# Altium PCB 转叶板-轴心.PcbDoc
Units mm, origin at the board's own origin, x right, y up, seen from the top; angles counter-clockwise.
Board outline 45 x 45 mm, 2 copper layers (Top Layer, Bottom Layer); 10 components, 3 nets, 26 pads, 0 vias.
Unrouted connection lines stored in the file: 21.
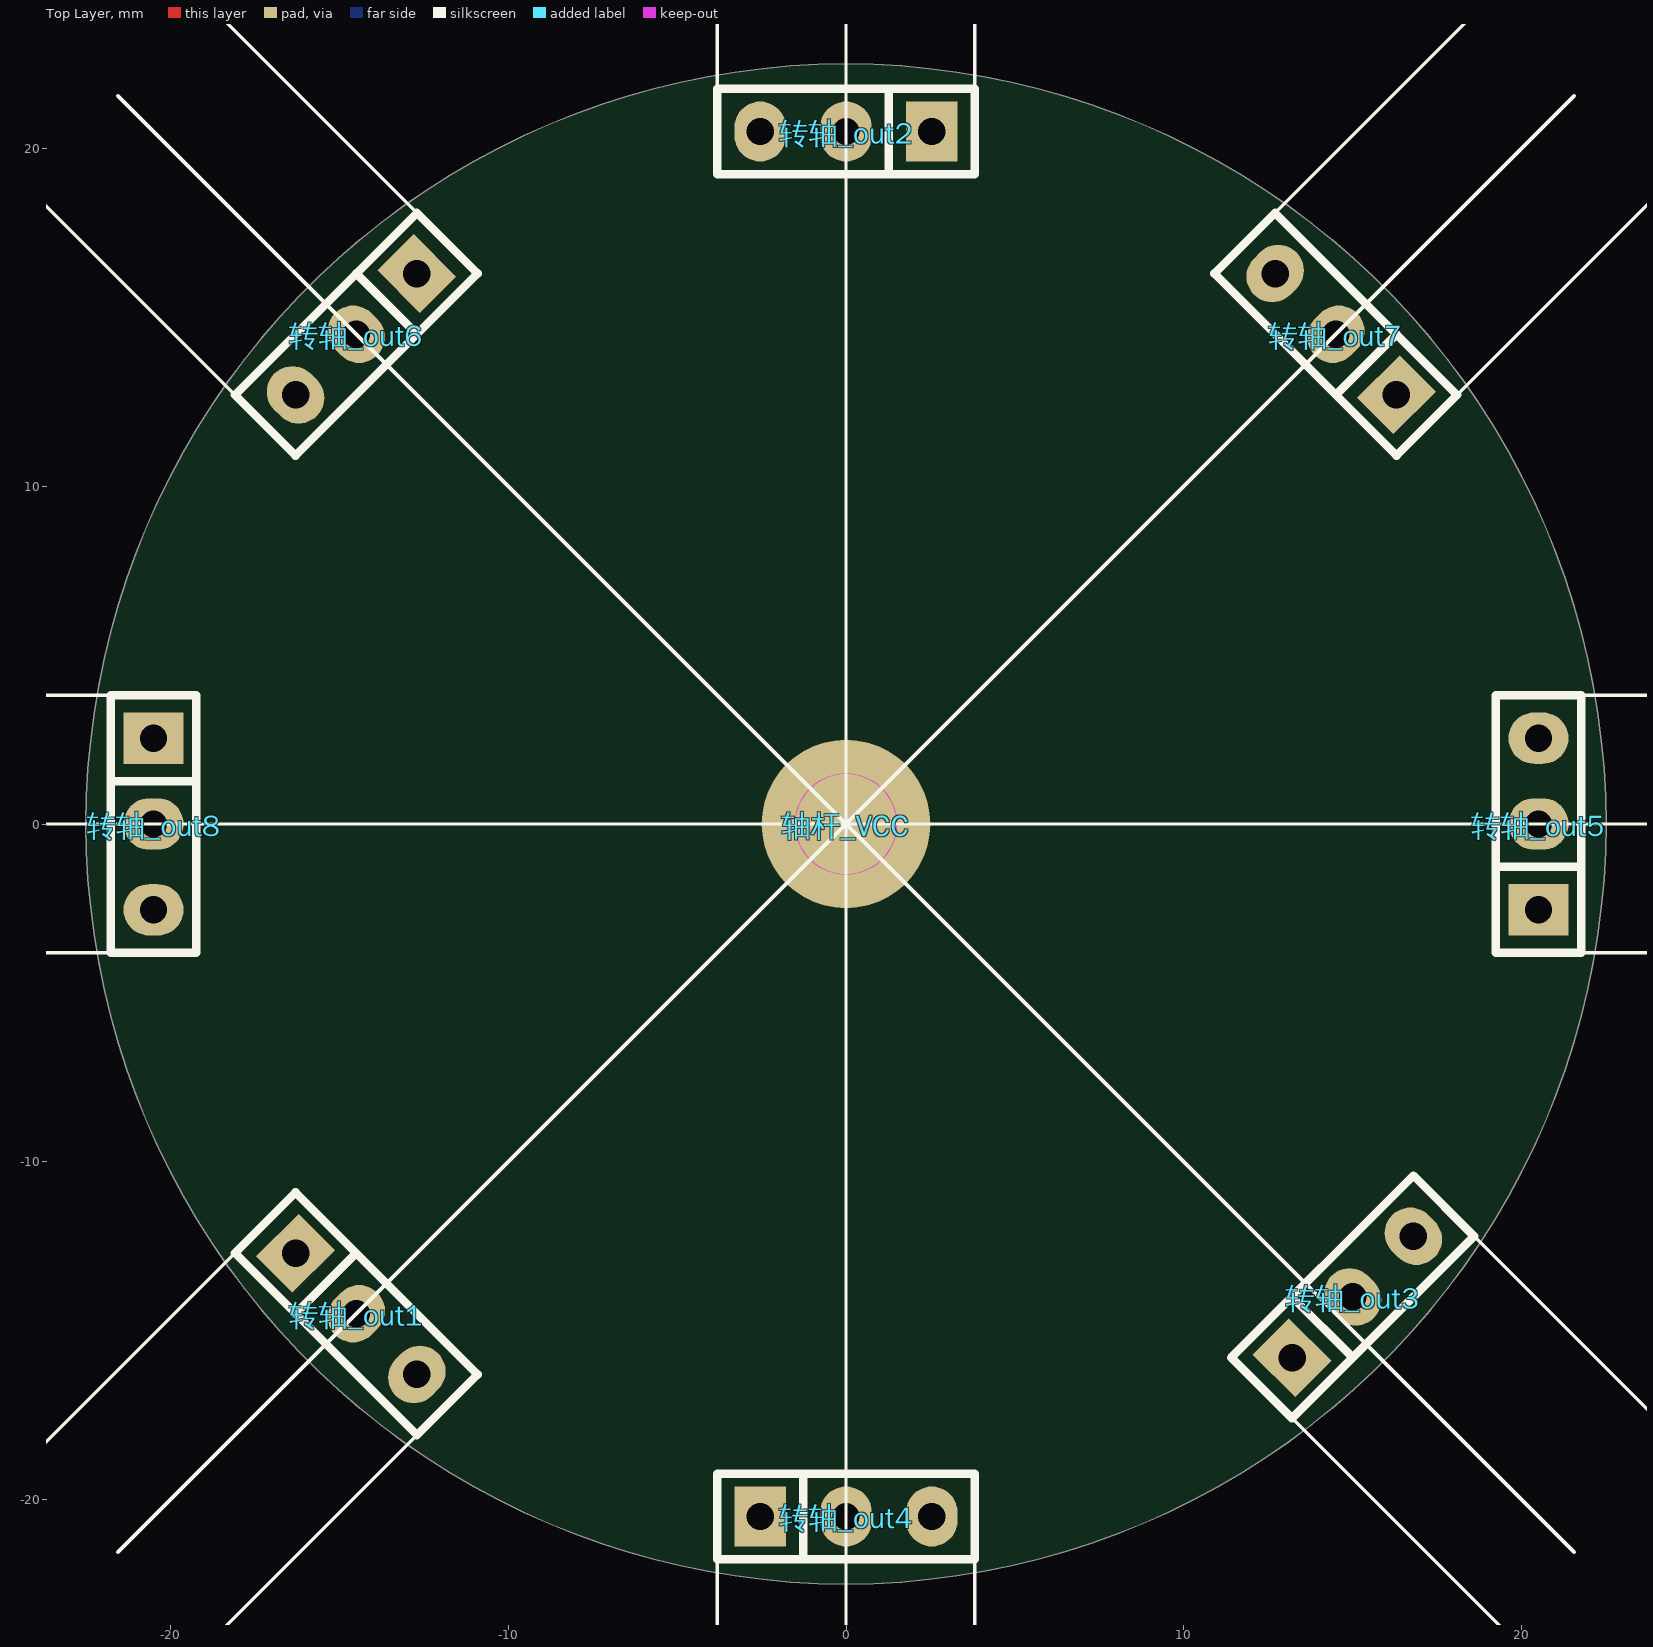
[diagram p0: Top Layer view]
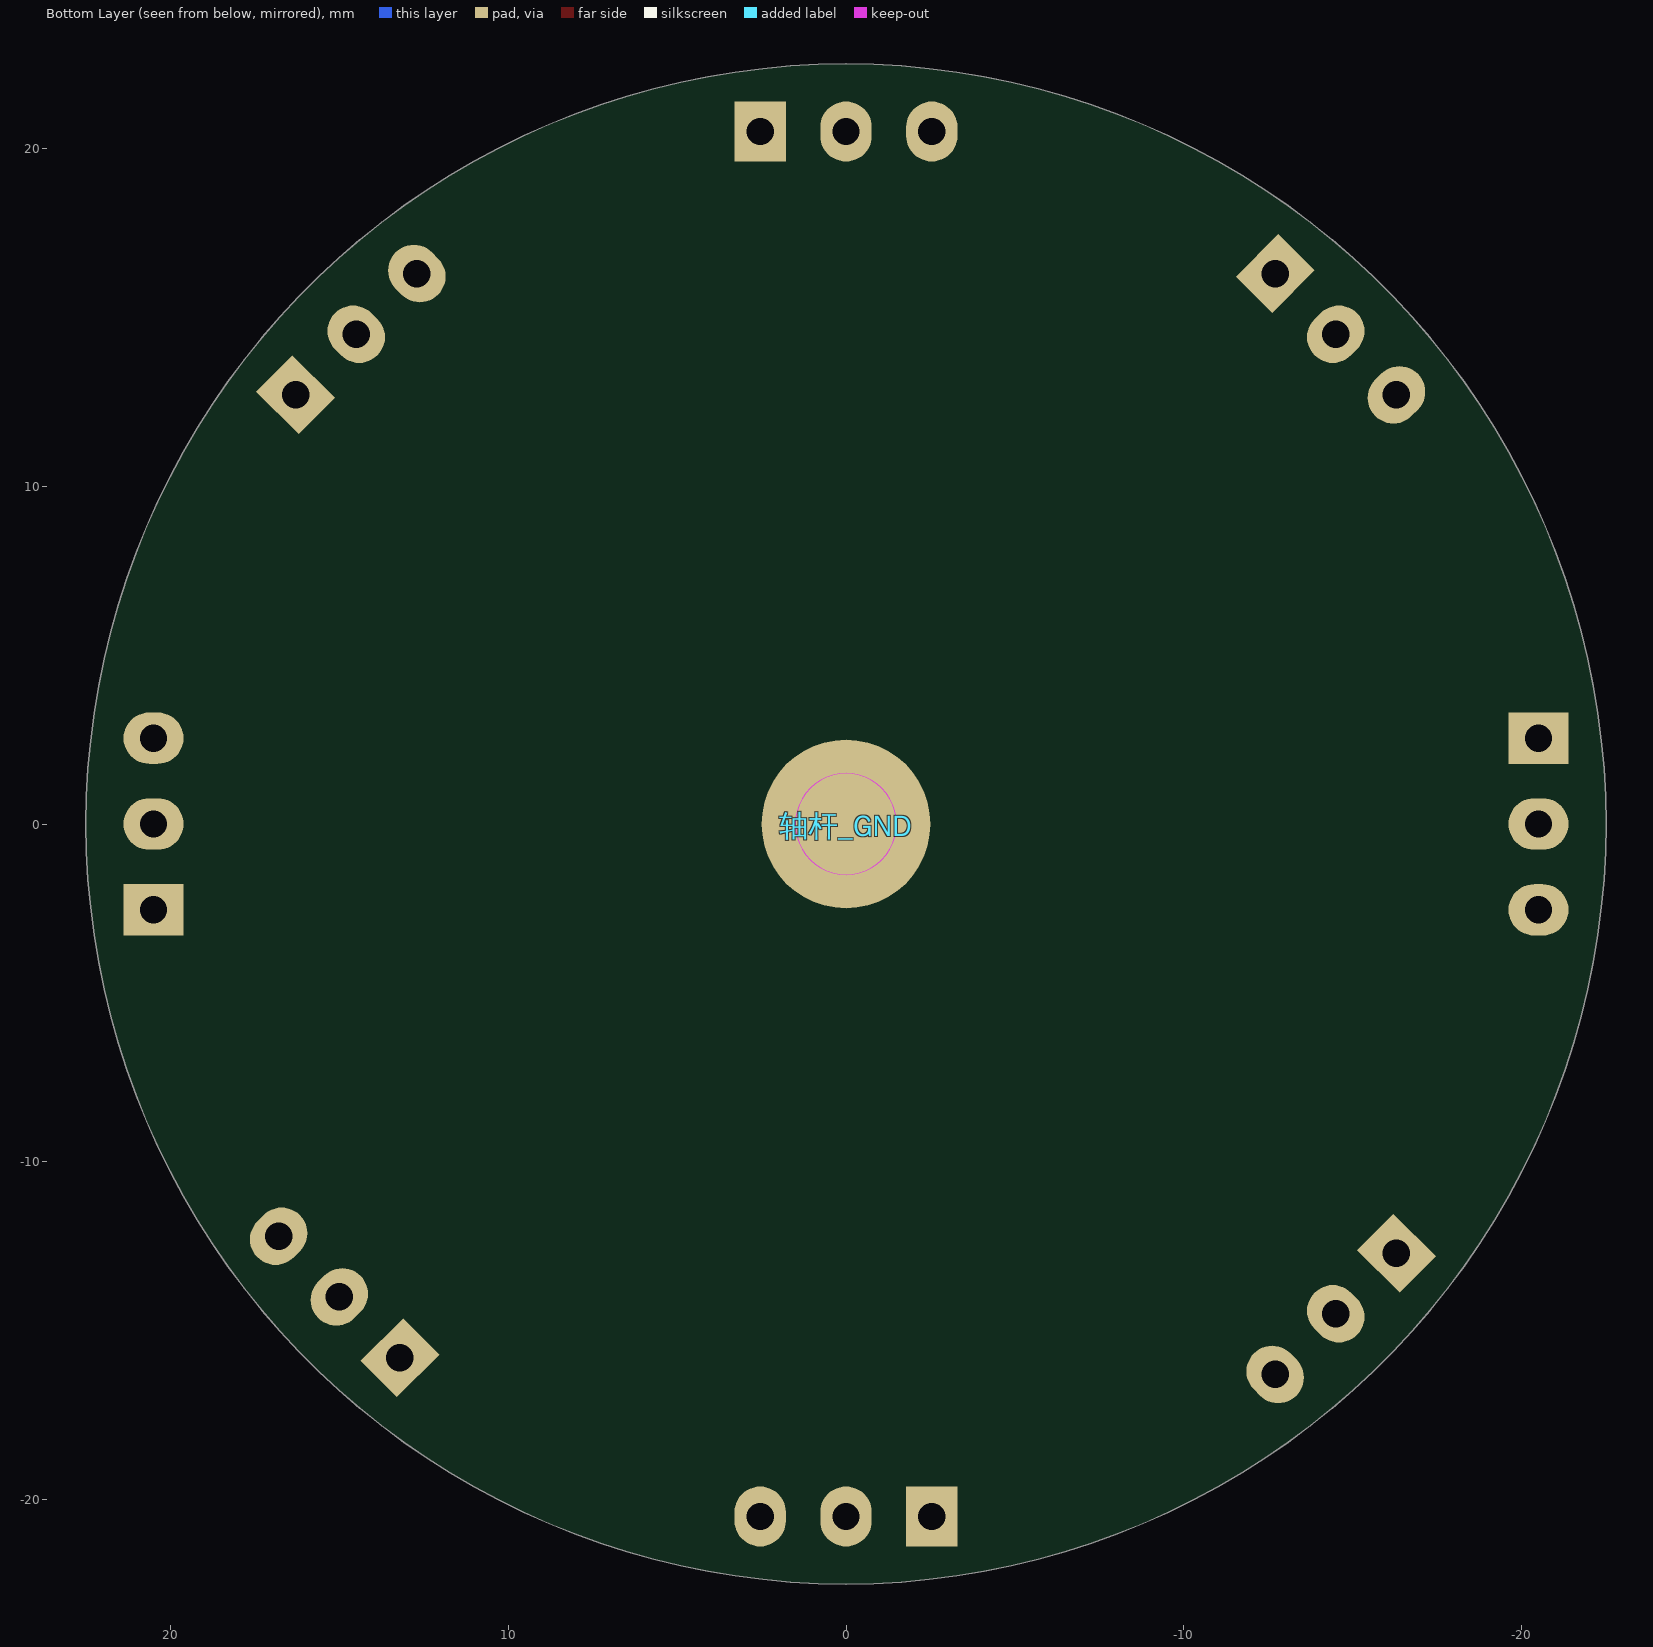
[diagram p1: Bottom Layer view, seen from below]

## Layer stack, top to bottom
Top Solder: solder mask 0.0102, Solder Resist, Dk 3.5
Top Layer: signal copper 0.0356
Dielectric 1: dielectric 0.32, FR-4, Dk 4.8
Bottom Layer: signal copper 0.0356
Bottom Solder: solder mask 0.0102, Solder Resist, Dk 3.5

## Board outline
-22.5,0 ccw(c0,0) 0,-22.5 ccw(c0,0) 22.5,0 ccw(c0,0) 0,22.5 ccw(c0,0)
cut-out: 0,1.5 cw(c0,0) 1.5,0 cw(c0,0) 0,-1.5 cw(c0,0) -1.5,0 cw(c0,0)

## Design rules (kind name [scope] priority, off if disabled: settings)
Clearance [All] p1: gap=0.254 ignorepadtopadclearanceinfootprint=FALSE except(0: Arc-Hole Track-Hole SMDPad-Hole THPad-Hole Via-Hole Fill-Hole Poly-Hole Region-Hole Text-Hole)
PolygonConnect [All] p1: connectstyle=Relief reliefconductorwidth=0.254 reliefentries=4 polygonreliefangle="90 Angle" airgapwidth=0.254
RoutingVias [All] p1: holewidth=0.711 width=1.27 viastyle="Through Hole" minholewidth=0.711 minwidth=1.27 maxholewidth=0.711 maxwidth=1.27
SolderMaskExpansion [All] p1: expansion=0.102 istentingtop=FALSE
Width [All] p1: maxlimit=0.254 minlimit=0.254 preferedwidth=0.254
30 further rules are at their usual default settings.

## Components (designator, comment, footprint, x,y, rotation, side; value= is the part's Value field where it differs from the comment)
转轴_out1 "留三个焊盘" "Pin HDR1X3/2.54mm-S" -16.296,-12.704 r45 top
转轴_out2 "留三个焊盘" "Pin HDR1X3/2.54mm-S" 2.54,20.5 r270 top
转轴_out3 "留三个焊盘" "Pin HDR1X3/2.54mm-S" 13.204,-15.796 r135 top
转轴_out4 "留三个焊盘" "Pin HDR1X3/2.54mm-S" -2.54,-20.5 r90 top
转轴_out5 "留三个焊盘" "Pin HDR1X3/2.54mm-S" 20.5,-2.54 r180 top
转轴_out6 "留三个焊盘" "Pin HDR1X3/2.54mm-S" -12.704,16.296 r315 top
转轴_out7 "留三个焊盘" "Pin HDR1X3/2.54mm-S" 16.296,12.704 r225 top
转轴_out8 "留三个焊盘" "Pin HDR1X3/2.54mm-S" -20.5,2.54 r0 top
轴杆_GND "CS" 轴杆 0,0 r90 bottom
轴杆_VCC "CS" 轴杆 0,0 r90 top

## Footprints (in the part's own frame and the unit in brackets; to place one, negate y for a bottom-side part, rotate by r counter-clockwise, add the part's x,y. Pads: shape width x height; smd on the part's side, far side on the other; paste and mask are expansions set on the pad)
"Pin HDR1X3/2.54mm-S" [mil]
  rect 70x60 hole 32: 1(0,0)
  oval 70x60 hole 32: 2(0,-100) 3(0,-200)
  silkscreen extent -50,-250 50,50, body extent -50,-250 50,50, height 336
轴杆 [mm]
  round 5 smd mask+0.102: ""(0,0)
  body extent -2.51,-2.51 2.51,2.51, height 20

## Part data
转轴_out1 转轴_out2 转轴_out3 转轴_out4 转轴_out5 转轴_out6 转轴_out7 转轴_out8: library part "Pin HDR1X3"
轴杆_GND 轴杆_VCC: "探针焊盘", BOM名称=探针焊盘, 联系卖家，免费查找封装=唯一出售店铺网址https://shop463601444.taobao.com

## Nets (pads, with @x,y where several pads share a name; then routed paths per layer and width w, separated by ;. In a path a pad name is that pad's centre, name@x,y a point inside that pad or via, vN(x,y) a via of type N, cw(c..) or ccw(c..) an arc to the next point about the centre after c; other vN are vias at no path point)
GND: 转轴_out1.3 转轴_out2.3 转轴_out3.3 转轴_out4.3 转轴_out5.3 转轴_out6.3 转轴_out7.3 转轴_out8.3
VCC: 转轴_out1.1 转轴_out2.1 转轴_out3.1 转轴_out4.1 转轴_out5.1 转轴_out6.1 转轴_out7.1 转轴_out8.1
WS2812_DATA: 转轴_out1.2 转轴_out2.2 转轴_out3.2 转轴_out4.2 转轴_out5.2 转轴_out6.2 转轴_out7.2 转轴_out8.2
pads on no net: 轴杆_GND. 轴杆_VCC.

## Silkscreen, mask and mechanical layers (free items; w line width, h text height)
Top Overlay:
  lines w0.1: -30.5,0 0,0 ; -21.77,-3.81 -100,-3.81 -100,3.81 -21.77,3.81 ; -21.567,-21.567 0,0 ; -21.567,21.567 0,0 ; -18.092,-12.704 -73.409,-68.021 -68.021,-73.409 -12.704,-18.092 ; -18.092,12.704 -73.409,68.021 -68.021,73.409 -12.704,18.092 ; -3.81,-100 -3.81,-21.77 ; -3.81,21.77 -3.81,100 3.81,100 3.81,21.77 ; -3.31,-99.5 4.31,-99.5 ; 0,-30.5 0,0 ; 0,30.5 0,0 ; 3.81,-100 3.81,-21.77 ; 12.704,18.092 68.021,73.409 73.409,68.021 18.092,12.704 ; 13.204,-17.592 68.521,-72.909 73.909,-67.521 18.592,-12.204 ; 21.567,-21.567 0,0 ; 21.567,21.567 0,0 ; 21.77,-3.81 100,-3.81 100,3.81 21.77,3.81 ; 30.5,0 0,0
Mechanical 1:
  circle w0.1: c0,0 r22.5
  circle w0.1: c0,0 r1.5